# EAGLE board waterworx (EAGLE 6.2)
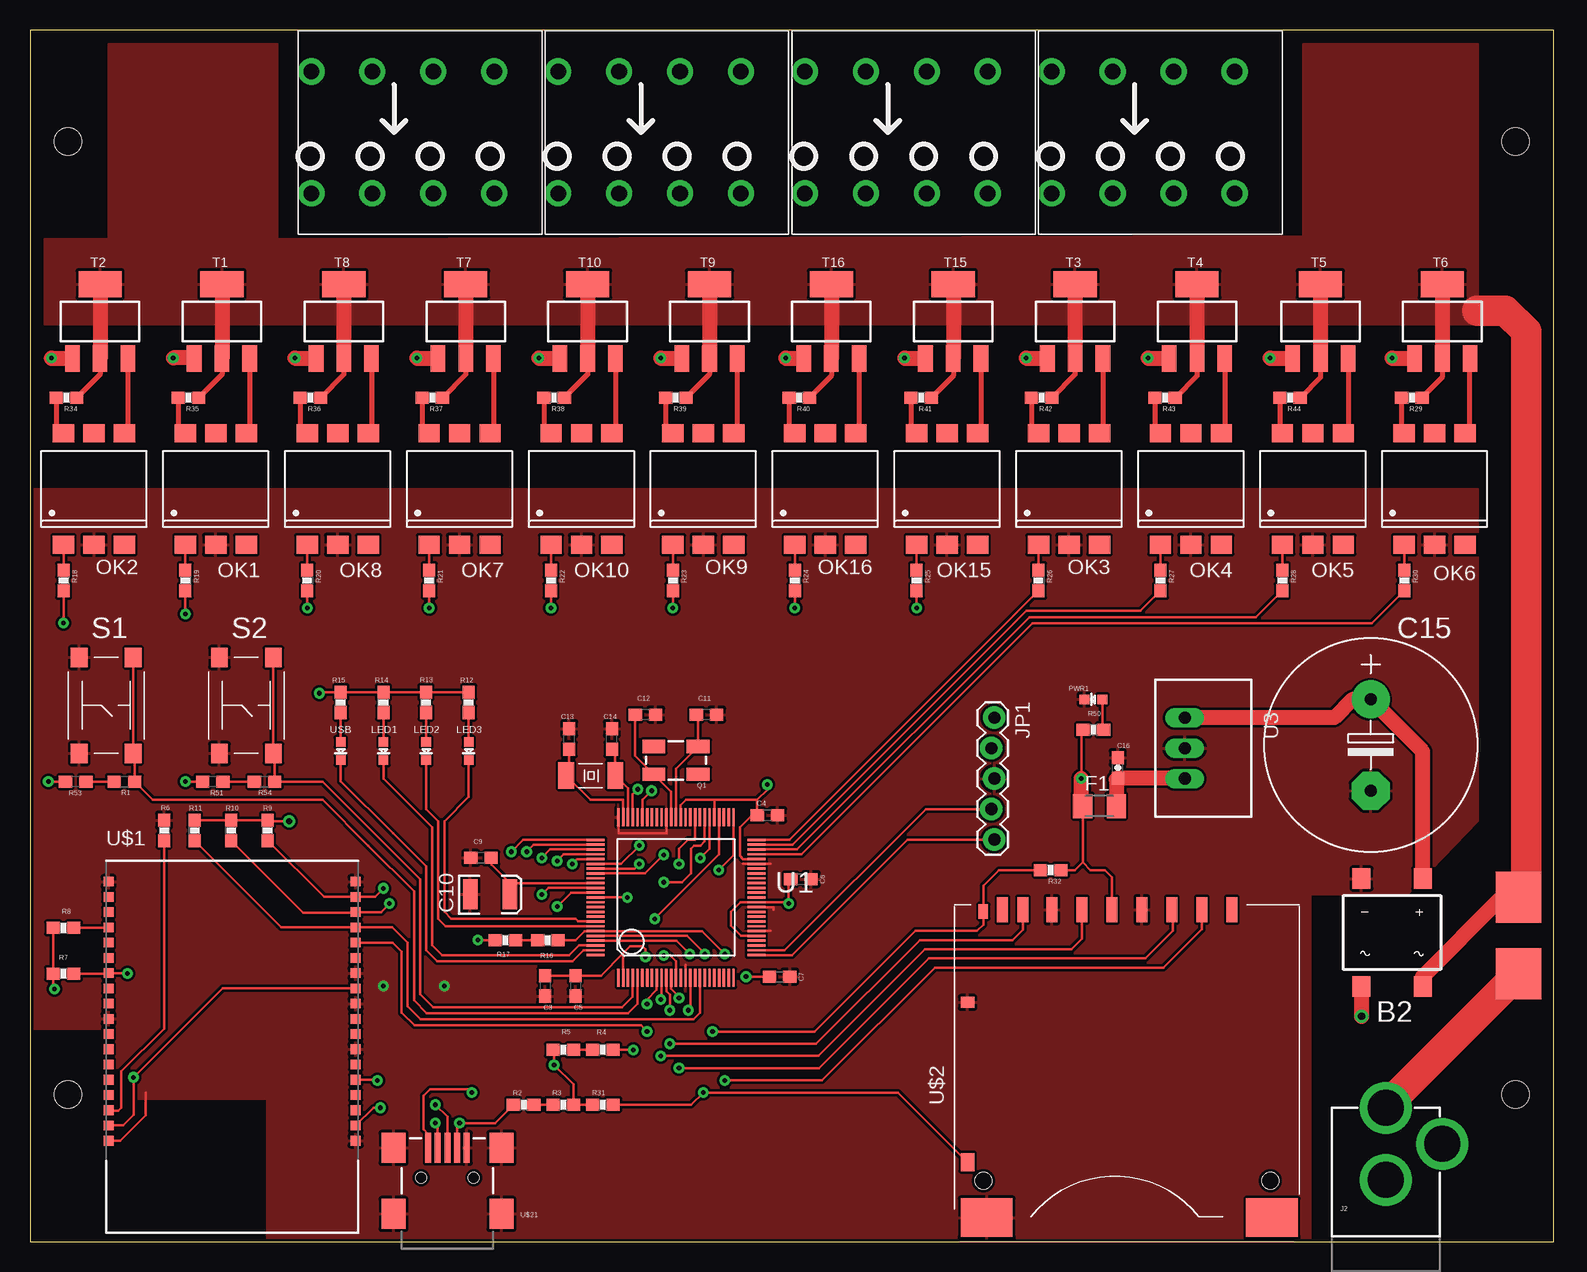
[diagram p0: board, top side]
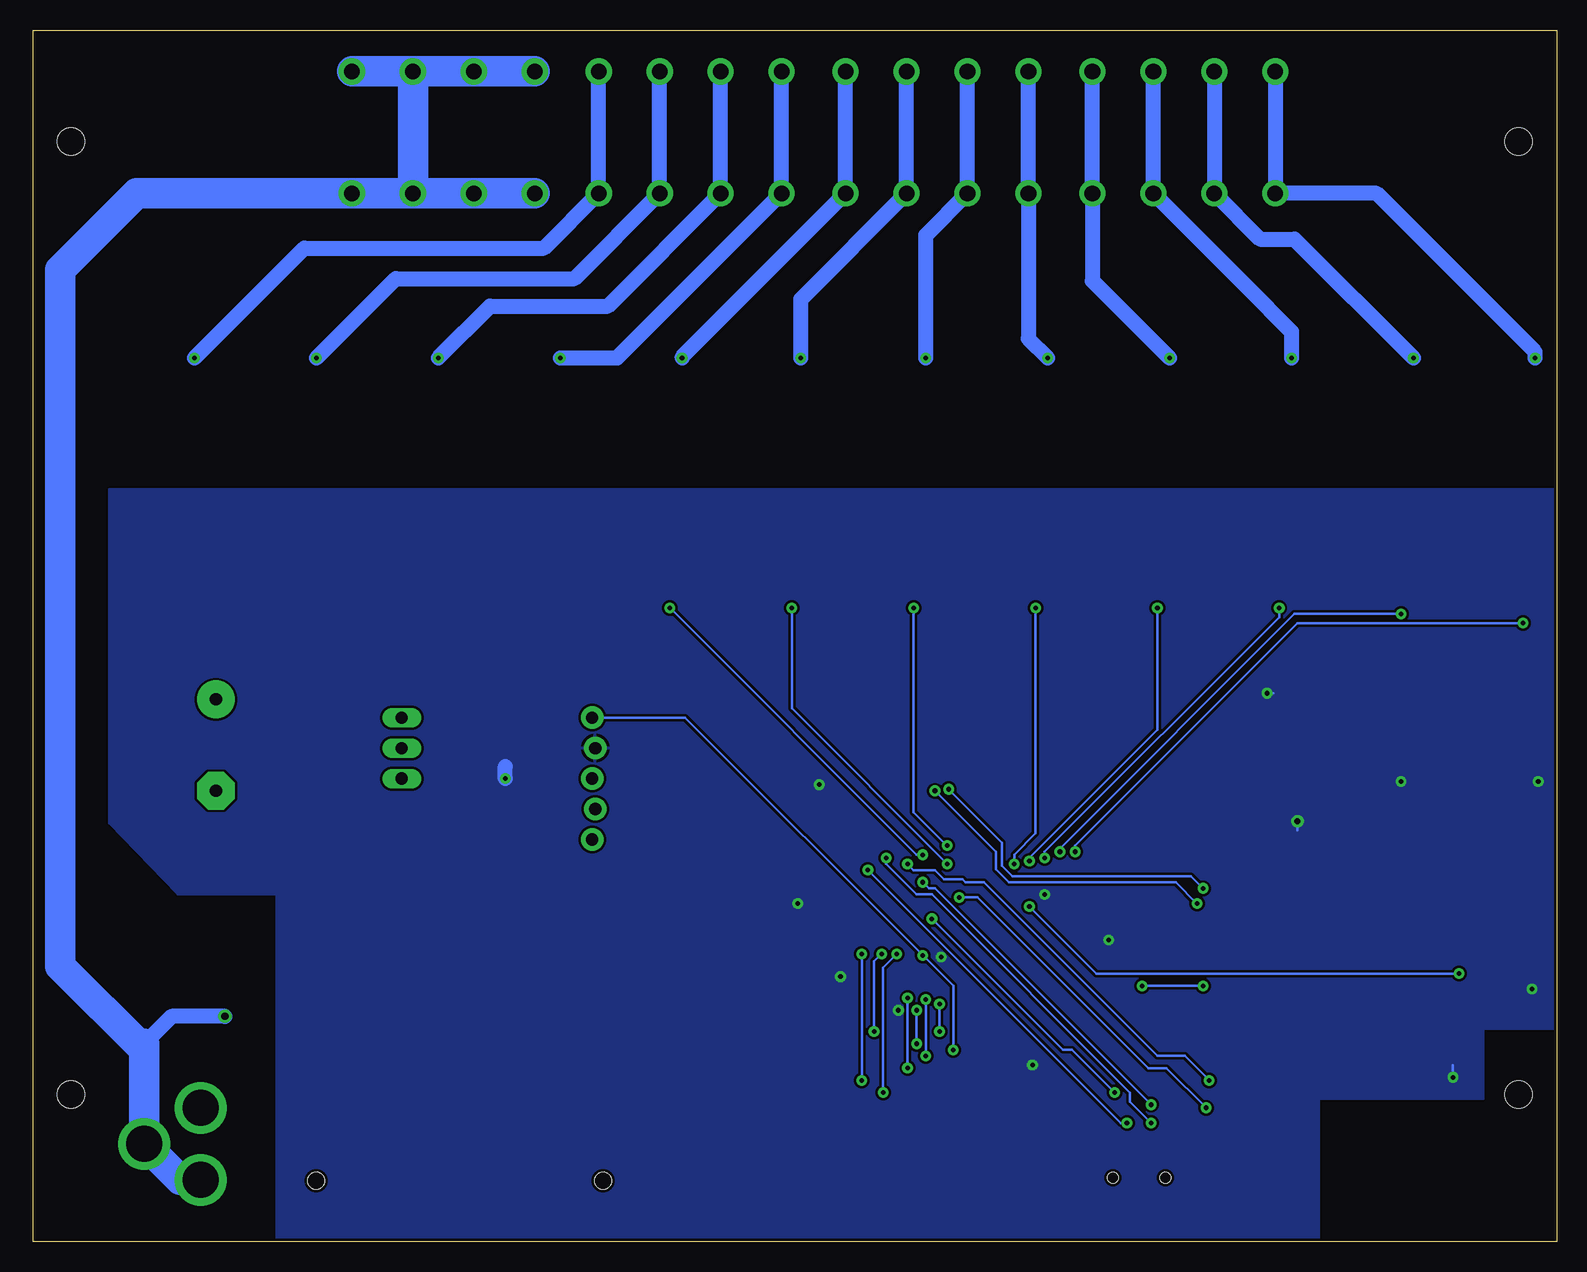
[diagram p1: board, bottom side, seen from below]

Size 127 x 100.99 mm. Coordinates in mm from the lower left corner, seen from the top.
Outline: 0,0 127,0 127,100.99 0,100.99 0,0
Copper layers (1*16): Top 0.035mm / dielectric 1.5mm / Bottom 0.035mm
Design rules: minimum track width 7mil, minimum drill 15mil, track to track 8mil, track to pad 8mil, pad to pad 8mil, via to via 8mil, smd to smd 8mil, copper to edge 10mil, drill to drill 8mil, minimum pad ring 12mil, minimum via ring 10mil, stop-mask expansion 4mil, vias tented up to drill 25mil, thermal gap 10mil
Holes 2.29 mm at 3.17,91.7 3.17,12.3 123.83,12.3 123.83,91.7

## Footprints (pad centres in the part's own frame; a part is rotated, then mirrored left to right if it is on the bottom)
DFS = smd 1.5 x 1.7: + -2.55,-4.5; - 2.55,-4.5; AC1 -2.55,4.5; AC2 2.55,4.5
0603 = smd 1.1 x 1: 1 -0.85,0; 2 0.85,0
EIA3528 = smd 1.2 x 2.5: A 1.65,0; C -1.65,0
E7,5-18 = drill 1.016 pad 3.15: + -3.81,0 | drill 1.016 pad 3.15 octagon: - 3.81,0
0603-CAP = smd 1.1 x 1: 1 -0.85,0; 2 0.85,0
M1206 = smd 1.6 x 2: 1 -1.4,0; 2 1.4,0
NANO2_HOLDER = smd 4.24 x 3.81: 1 -3.185,0; 2 3.185,0
POWER_JACK_PTH = drill 2.997 pad 4.318: GND 0,7.7; GNDBREAK 4.7,10.7; PWR 0,13.7
1X05_LOCK = drill 1.016 pad 1.88: 1 0,0.127; 2 2.54,-0.127; 3 5.08,0.127; 4 7.62,-0.127; 5 10.16,0.127
PHOENIX_TERMINAL_4 = drill 1.3 pad 2.184: 1B 1.1,-5.08; 1T 1.1,5.08; 2B 6.18,-5.08; 2T 6.18,5.08; 3B 11.26,-5.08; 3T 11.26,5.08; 4B 16.34,-5.08; 4T 16.34,5.08
LED-0603 = smd 0.8 x 0.8: A 0,-0.75; C 0,0.75
DIL6-SMD = smd 1.78 x 1.52: 1 -2.54,-4.645; 2 0,-4.645; 3 2.54,-4.645; 4 2.54,4.645; 5 0,4.645; 6 -2.54,4.645
CRYSTAL-SMD-5X3 = smd 1.9 x 1.1: 1 -1.85,-1.15; 2 1.85,-1.15; 3 1.85,1.15; 4 -1.85,1.15
CRYSTAL-SMD-4X2 = smd 1.3 x 2.2: P$1 -2.05,0; P$2 2.05,0
0603-RES = smd 1.1 x 1: 1 -0.85,0; 2 0.85,0
SWITCH-OMRON = smd 1.6 x 1.4: 1 4,-2.25; 2 -4,-2.25; 3 4,2.25; 4 -4,2.25
SOT223 = smd 1.219 x 2.235: 1 -2.311,-3.099; 2 0,-3.099; 3 2.311,-3.099 | smd 3.6 x 2.2: 4 0,3.099
TQFP100 = smd 0.2 x 1.5: 1 -4.8,-6.7; 2 -4.4,-6.7; 3 -4,-6.7; 4 -3.6,-6.7; 5 -3.2,-6.7; 6 -2.8,-6.7; 7 -2.4,-6.7; 8 -2,-6.7; 9 -1.6,-6.7; 10 -1.2,-6.7; 11 -0.8,-6.7; 12 -0.4,-6.7; 13 0,-6.7; 14 0.4,-6.7; 15 0.8,-6.7; 16 1.2,-6.7; 17 1.6,-6.7; 18 2,-6.7; 19 2.4,-6.7; 20 2.8,-6.7; 21 3.2,-6.7; 22 3.6,-6.7; 23 4,-6.7; 24 4.4,-6.7; 25 4.8,-6.7; 51 4.8,6.7; 52 4.4,6.7; 53 4,6.7; 54 3.6,6.7; 55 3.2,6.7; 56 2.8,6.7; 57 2.4,6.7; 58 2,6.7; 59 1.6,6.7; 60 1.2,6.7; 61 0.8,6.7; 62 0.4,6.7; 63 0,6.7; 64 -0.4,6.7; 65 -0.8,6.7; 66 -1.2,6.7; 67 -1.6,6.7; 68 -2,6.7; 69 -2.4,6.7; 70 -2.8,6.7; 71 -3.2,6.7; 72 -3.6,6.7; 73 -4,6.7; 74 -4.4,6.7; 75 -4.8,6.7 | smd 1.5 x 0.2: 26 6.7,-4.8; 27 6.7,-4.4; 28 6.7,-4; 29 6.7,-3.6; 30 6.7,-3.2; 31 6.7,-2.8; 32 6.7,-2.4; 33 6.7,-2; 34 6.7,-1.6; 35 6.7,-1.2; 36 6.7,-0.8; 37 6.7,-0.4; 38 6.7,0; 39 6.7,0.4; 40 6.7,0.8; 41 6.7,1.2; 42 6.7,1.6; 43 6.7,2; 44 6.7,2.4; 45 6.7,2.8; 46 6.7,3.2; 47 6.7,3.6; 48 6.7,4; 49 6.7,4.4; 50 6.7,4.8; 76 -6.7,4.8; 77 -6.7,4.4; 78 -6.7,4; 79 -6.7,3.6; 80 -6.7,3.2; 81 -6.7,2.8; 82 -6.7,2.4; 83 -6.7,2; 84 -6.7,1.6; 85 -6.7,1.2; 86 -6.7,0.8; 87 -6.7,0.4; 88 -6.7,0; 89 -6.7,-0.4; 90 -6.7,-0.8; 91 -6.7,-1.2; 92 -6.7,-1.6; 93 -6.7,-2; 94 -6.7,-2.4; 95 -6.7,-2.8; 96 -6.7,-3.2; 97 -6.7,-3.6; 98 -6.7,-4; 99 -6.7,-4.4; 100 -6.7,-4.8
RECOM = drill 1.016 long: GND 0,-2.54; VIN -2.54,-2.54; VOUT 2.54,-2.54
SMD_MRF = smd 0.85 x 0.8: 1 0.2,-1.73; 2 0.2,-3; 3 0.2,-4.27; 4 0.2,-5.54; 5 0.2,-6.81; 6 0.2,-8.08; 7 0.2,-9.35; 8 0.2,-10.62; 9 0.2,-11.89; 10 0.2,-13.16; 11 0.2,-14.43; 12 0.2,-15.7; 13 0.2,-16.97; 14 0.2,-18.24; 15 0.2,-19.51; 16 0.2,-20.78; 17 0.2,-22.05; 18 0.2,-23.32; 19 20.8,-23.32; 20 20.8,-22.05; 21 20.8,-20.78; 22 20.8,-19.51; 23 20.8,-18.24; 24 20.8,-16.97; 25 20.8,-15.7; 26 20.8,-14.43; 27 20.8,-13.16; 28 20.8,-11.89; 29 20.8,-10.62; 30 20.8,-9.35; 31 20.8,-8.08; 32 20.8,-6.81; 33 20.8,-5.54; 34 20.8,-4.27; 35 20.8,-3; 36 20.8,-1.73
SD_ALPS = smd 0.9 x 2.1: 1 6.255,22.6; 2 3.755,22.6; 3 1.255,22.6; 4 -1.245,22.6; 5 -3.745,22.6; 6 -6.245,22.6; 7 -8.67,22.6; 8 -10.37,22.6; 9 8.755,22.6 | smd 4.32 x 3.2: 12 -11.69,-3.05; 13 12.09,-3.05 | smd 0.8 x 1.2: CD -11.97,22.45 | smd 1.13 x 0.9: VSS -13.285,14.88 | smd 1.13 x 1.5: WP -13.285,1.57 | hole 1.4: 11.97,0; -11.97,0
USB-MINIB = smd 2.5 x 0.5: D+ 2.5,0; D- 2.5,0.8; GND 2.5,-1.6; ID 2.5,-0.8; VBUS 2.5,1.6 | smd 2.5 x 2: MTN1 -3,4.5; MTN2 2.5,4.5; MTN3 -3,-4.5; MTN4 2.5,-4.5 | hole 0.9: 0,2.2; 0,-2.2

## Placement (x,y rotation side)
B2  DF01S  [DFS]  113.54,25.78 180 top
C3  0.1uF  [0603]  42.93,21.34 270 top
C4  0.1uF  [0603]  61.47,35.56 0 top
C5  0.1uF  [0603]  45.47,21.34 270 top
C6  0.1uF  [0603]  64.26,30.23 0 top
C7  0.1uF  [0603]  62.48,22.1 0 top
C9  0.1uF  [0603]  37.59,32 180 top
C10  10uF  [EIA3528]  38.35,28.96 0 top
C11  18pF  [0603]  56.39,43.94 180 top
C12  18pF  [0603]  51.31,43.94 180 top
C13  11pf  [0603]  44.96,41.91 90 top
C14  11pf  [0603]  48.51,41.91 90 top
C15  1000uF  [E7,5-18]  111.76,41.4 270 top
C16  1uF  [0603-CAP]  90.68,39.5 90 top
F1  500mA PTC Fuse  [M1206]  89.15,36.32 0 top
F2  [NANO2_HOLDER]  124.08,25.53 90 top
J2  POWER_JACKPTH  [POWER_JACK_PTH]  113.03,-2.54 0 top
JP1  [1X05_LOCK]  80.26,43.69 270 top
JP2  Stations 1-4  [PHOENIX_TERMINAL_4]  22.35,92.46 0 top
JP3  Stations 5-8  [PHOENIX_TERMINAL_4]  42.93,92.46 0 top
JP4  Stations 9-12  [PHOENIX_TERMINAL_4]  63.5,92.46 0 top
JP6  COM  [PHOENIX_TERMINAL_4]  84.07,92.46 0 top
LED1  WHITE  [LED-0603]  29.46,40.89 180 top
LED2  RED  [LED-0603]  33.02,40.89 180 top
LED3  YELLOW  [LED-0603]  36.58,40.89 180 top
OK1  MOC3032S  [DIL6-SMD]  15.49,62.74 0 top
OK2  MOC3032S  [DIL6-SMD]  5.33,62.74 0 top
OK3  MOC3032S  [DIL6-SMD]  86.61,62.74 0 top
OK4  MOC3032S  [DIL6-SMD]  96.77,62.74 0 top
OK5  MOC3032S  [DIL6-SMD]  106.93,62.74 0 top
OK6  MOC3032S  [DIL6-SMD]  117.09,62.74 0 top
OK7  MOC3032S  [DIL6-SMD]  35.81,62.74 0 top
OK8  MOC3032S  [DIL6-SMD]  25.65,62.74 0 top
OK9  MOC3032S  [DIL6-SMD]  56.13,62.74 0 top
OK10  MOC3032S  [DIL6-SMD]  45.97,62.74 0 top
OK15  MOC3032S  [DIL6-SMD]  76.45,62.74 0 top
OK16  MOC3032S  [DIL6-SMD]  66.29,62.74 0 top
PWR1  BLUE  [LED-0603]  88.65,45.21 90 top
Q1  8MHz  [CRYSTAL-SMD-5X3]  53.85,40.13 180 top
Q2  32.768 KHz  [CRYSTAL-SMD-4X2]  46.74,38.86 0 top
R1  4.7K  [0603]  7.87,38.35 0 top
R2  4.7K  [0603-RES]  41.15,11.43 0 top
R3  4.7K  [0603-RES]  44.45,11.43 0 top
R4  4.7K  [0603-RES]  47.75,16 180 top
R5  4.7K  [0603-RES]  44.45,16 0 top
R6  4.7K  [0603-RES]  11.18,34.29 270 top
R7  4.7K  [0603-RES]  2.79,22.35 180 top
R8  4.7K  [0603-RES]  2.79,26.16 0 top
R9  4.7K  [0603-RES]  19.81,34.29 90 top
R10  4.7K  [0603-RES]  16.76,34.29 90 top
R11  4.7K  [0603-RES]  13.72,34.29 90 top
R12  330  [0603-RES]  36.58,44.96 90 top
R13  330  [0603-RES]  33.02,44.96 90 top
R14  330  [0603-RES]  29.46,44.96 90 top
R15  330  [0603-RES]  25.91,44.96 90 top
R16  4.7K  [0603-RES]  43.18,25.15 0 top
R17  4.7K  [0603-RES]  39.62,25.15 180 top
R18  330  [0603-RES]  2.79,55.12 270 top
R19  330  [0603-RES]  12.95,55.12 270 top
R20  330  [0603-RES]  23.11,55.12 270 top
R21  330  [0603-RES]  33.27,55.12 270 top
R22  330  [0603-RES]  43.43,55.12 270 top
R23  330  [0603-RES]  53.59,55.12 270 top
R24  330  [0603-RES]  63.75,55.12 270 top
R25  330  [0603-RES]  73.91,55.12 270 top
R26  330  [0603-RES]  84.07,55.12 270 top
R27  330  [0603-RES]  94.23,55.12 270 top
R28  330  [0603-RES]  104.39,55.12 270 top
R29  33  [0603-RES]  115.19,70.36 180 top
R30  330  [0603-RES]  114.55,55.12 270 top
R31  4.7K  [0603-RES]  47.75,11.43 0 top
R32  4.7K  [0603-RES]  85.09,30.99 180 top
R34  33  [0603-RES]  3.05,70.36 180 top
R35  33  [0603-RES]  13.21,70.36 180 top
R36  33  [0603-RES]  23.37,70.36 180 top
R37  33  [0603-RES]  33.53,70.36 180 top
R38  33  [0603-RES]  43.69,70.36 180 top
R39  33  [0603-RES]  53.85,70.36 180 top
R40  33  [0603-RES]  64.14,70.36 180 top
R41  33  [0603-RES]  74.3,70.36 180 top
R42  33  [0603-RES]  84.33,70.36 180 top
R43  33  [0603-RES]  94.61,70.36 180 top
R44  33  [0603-RES]  105.03,70.36 180 top
R50  330  [0603-RES]  88.65,42.67 180 top
R51  4.7K  [0603]  15.24,38.35 180 top
R53  4.7K  [0603]  3.81,38.35 180 top
R54  4.7K  [0603]  19.56,38.35 0 top
S1  S1  [SWITCH-OMRON]  6.35,44.7 270 top
S2  [SWITCH-OMRON]  18.03,44.7 270 top
T1  LF-TRIACSOT223  [SOT223]  16,76.71 0 top
T2  LF-TRIACSOT223  [SOT223]  5.84,76.71 0 top
T3  LF-TRIACSOT223  [SOT223]  87.12,76.71 0 top
T4  LF-TRIACSOT223  [SOT223]  97.28,76.71 0 top
T5  LF-TRIACSOT223  [SOT223]  107.57,76.71 0 top
T6  LF-TRIACSOT223  [SOT223]  117.73,76.71 0 top
T7  LF-TRIACSOT223  [SOT223]  36.32,76.71 0 top
T8  LF-TRIACSOT223  [SOT223]  26.16,76.71 0 top
T9  LF-TRIACSOT223  [SOT223]  56.64,76.71 0 top
T10  LF-TRIACSOT223  [SOT223]  46.48,76.71 0 top
T15  LF-TRIACSOT223  [SOT223]  76.96,76.71 0 top
T16  LF-TRIACSOT223  [SOT223]  66.8,76.71 0 top
U1  PIC32MX460F512L TQFP100  [TQFP100]  53.85,28.7 0 top
U3  RECOM_X.X_REG78XX  [RECOM]  98.81,41.15 270 top
U$1  MRF24WB0MA  [SMD_MRF]  6.35,31.75 0 top
U$2  SD_CARD_SOCKETALPS  [SD_ALPS]  91.44,5.08 0 top
U$21  USB-MINIB-5PIN  [USB-MINIB]  34.8,5.33 90 top
USB  GREEN  [LED-0603]  25.91,40.89 180 top

## Library data of the parts
B2 F2 J2 JP2-JP4 JP6 Q2 S1 S2 T1-T10 T15 T16 U3 U$1 U$2 = lizardworx
C3-C6 C9 C11-C14 LED1-LED3 PWR1 R1 R51 R53 R54 USB = SparkFun
C7 C10 = SparkFun02-20-08
C15 = rcl
C16 R2-R32 R34-R44 R50 = SparkFun-Passives
F1 = resistor
JP1 U$21 = SparkFun-Connectors
OK1-OK10 OK15 OK16 = lizardworx; MF: FAIRCHILD SEMICONDUCTOR; MPN: MOC3032S-M; OC_FARNELL: unknown; OC_NEWARK: 05C2871
Q1 = SparkFun11_03_09
U1 = SchmalzHaus

## Nets
3.3V: C3.1 C4.1 C5.1 C6.1 C7.1 F1.1 JP1.2 R3.2 R5.1 R7.2 R8.1 R9.2 R10.2 R11.2 R12.2 R13.2 R14.2 R15.2 R17.2 R31.1 R32.1 R50.2 R51.2 R53.2 U1.2 U1.16 U1.30 U1.37 U1.46 U1.55 U1.62 U1.86 U$1.17 U$1.29 U$2.4
AC_HOT: B2.AC1 F2.2 R29.1 R34.1 R35.1 R36.1 R37.1 R38.1 R39.1 R40.1 R41.1 R42.1 R43.1 R44.1 T1.2 T1.4 T2.2 T2.4 T3.2 T3.4 T4.2 T4.4 T5.2 T5.4 T6.2 T6.4 T7.2 T7.4 T8.2 T8.4 T9.2 T9.4 T10.2 T10.4 T15.2 T15.4 T16.2 T16.4
AC_NEUTRAL: B2.AC2 J2.GND J2.GNDBREAK JP6.1B JP6.1T JP6.2B JP6.2T JP6.3B JP6.3T JP6.4B JP6.4T
CNTRL_1: R18.2 U1.76
CNTRL_2: R19.2 U1.77
CNTRL_3: R20.2 U1.78
CNTRL_4: R21.2 U1.79
CNTRL_5: R22.2 U1.80
CNTRL_6: R23.2 U1.81
CNTRL_7: R24.2 U1.82
CNTRL_8: R25.2 U1.83
CNTRL_9: R26.2 U1.50
CNTRL_10: R27.2 U1.49
CNTRL_11: R28.2 U1.48
CNTRL_12: R30.2 U1.47
D+: U1.57 U$21.D+
D-: U1.56 U$21.D-
GND: B2.- C3.2 C4.2 C5.2 C6.2 C7.2 C9.2 C10.C C11.1 C12.1 C13.2 C14.2 C15.- C16.2 JP1.3 OK1.2 OK2.2 OK3.2 OK4.2 OK5.2 OK6.2 OK7.2 OK8.2 OK9.2 OK10.2 OK15.2 OK16.2 PWR1.C R6.1 S1.1 S1.2 S2.1 S2.2 U1.15 U1.31 U1.36 U1.45 U1.65 U1.75 U3.GND U$1.1 U$1.10 U$1.18 U$1.19 U$1.25 U$1.28 U$1.30 U$1.36 U$2.3 U$2.6 U$2.12 U$2.VSS U$21.GND U$21.MTN1 U$21.MTN2 U$21.MTN3 U$21.MTN4
N$1: OK9.1 R23.1
N$2: OK1.1 R19.1
N$3: R51.1 R54.1
N$4: R1.1 R53.1
N$5: R8.2 U$1.4
N$6: OK1.6 R35.2
N$7: OK9.6 R39.2
N$8: OK1.4 T1.3
N$9: OK2.1 R18.1
N$10: R16.1 R17.1
N$11: R4.2 R5.2
N$12: OK2.6 R34.2
N$13: OK9.4 T9.3
N$14: OK2.4 T2.3
N$15: R2.2 R3.1
N$16: B2.+ C15.+ U3.VIN
N$17: OK3.1 R26.1
N$18: OK3.6 R42.2
N$19: PWR1.A R50.1
N$20: R15.1 USB.A
N$21: OK3.4 T3.3
N$22: LED1.A R14.1
N$23: LED2.A R13.1
N$24: C16.1 F1.2 U3.VOUT
N$25: OK6.1 R30.1
N$26: OK4.1 R27.1
N$27: OK4.6 R43.2
N$28: OK10.1 R22.1
N$29: OK4.4 T4.3
N$30: OK6.6 R29.2
N$31: OK6.4 T6.3
N$32: OK5.1 R28.1
N$33: OK5.6 R44.2
N$34: OK10.6 R38.2
N$35: LED3.A R12.1
N$36: OK5.4 T5.3
N$37: F2.1 J2.PWR
N$41: OK10.4 T10.3
N$45: OK7.1 R21.1
N$46: OK7.6 R37.2
N$48: OK7.4 T7.3
N$51: OK8.1 R20.1
N$52: OK8.6 R36.2
N$54: OK8.4 T8.3
N$76: OK15.1 R25.1
N$77: OK15.6 R41.2
N$78: OK15.4 T15.3
N$81: OK16.1 R24.1
N$82: OK16.6 R40.2
N$83: OK16.4 T16.3
N$110: C9.1 C10.A U1.85
OSC1: C11.2 Q1.1 U1.63
OSC2: C12.2 Q1.3 U1.64
PGC: JP1.5 U1.26
PGD: JP1.4 U1.27
RC13: C14.1 Q2.P$2 U1.73
RC14: C13.1 Q2.P$1 U1.74
RE0: LED3.C U1.93
RE1: LED2.C U1.94
RE2: LED1.C U1.98
RE3: U1.99 USB.C
RE6: R54.2 S2.3 S2.4 U1.4
RE7: R1.2 S1.3 S1.4 U1.5
SD_CD: R32.2 U1.96 U$2.CD
SD_CK: U1.10 U$2.5
SD_CS: R16.2 U1.95 U$2.1
SD_DI: U1.12 U$2.2
SD_DO: U1.11 U$2.7
SD_WP: R31.2 U1.97 U$2.WP
STATION_1: JP2.1B JP2.1T T2.1
STATION_2: JP2.2B JP2.2T T1.1
STATION_3: JP2.3B JP2.3T T8.1
STATION_4: JP2.4B JP2.4T T7.1
STATION_5: JP3.1B JP3.1T T10.1
STATION_6: JP3.2B JP3.2T T9.1
STATION_7: JP3.3B JP3.3T T16.1
STATION_8: JP3.4B JP3.4T T15.1
STATION_9: JP4.1B JP4.1T T3.1
STATION_10: JP4.2B JP4.2T T4.1
STATION_11: JP4.3B JP4.3T T5.1
STATION_12: JP4.4B JP4.4T T6.1
USBID: R2.1 U1.51 U$21.ID
VBUS: U1.54 U$21.VBUS
VPP: JP1.1 R4.1 U1.13
WF_CK: R10.1 U1.70 U$1.34
WF_CS: U1.59 U$1.23
WF_DI: R9.1 U1.72 U$1.35
WF_DO: U1.9 U$1.32
WF_HIBERNATE: U1.88 U$1.20
WF_INT: R11.1 U1.18 U$1.33
WF_RESET: R7.1 U1.87 U$1.7
WF_WP: R6.2 U$1.16

## Tracks (layer width: path | path; a pad name or v marks a point on that pad's centre or on a via)
3.3V  (via drill 0.38, 0.5)
  Top 0.203: R11.2 R10.2 R9.2 19.9,35.05 v21.59,35.05 | U$1.17 7.76,9.7 8.64,10.58 v8.64,13.72 16.05,21.13 U$1.29 | R8.1 R7.2 1.94,21.17 v2.03,21.08 | R50.2 87.63,42.51 v87.63,38.61 | F1.1 87.75,31.62 | 60.62,36.83 57.05,36.83 | 57.05,36.83 U1.55 | U1.62 54.25,36.39 54.69,36.83 57.05,36.83 | 49.45,24.05 U1.2 | 49.45,24.05 50.04,24.64 51.05,24.64 51.31,24.38 v51.31,23.75 | R51.2 v12.95,38.35 | R53.2 v1.52,38.35 | R12.2 R13.2 R14.2 R15.2 24.22,45.81 v24.13,45.72 | R17.2 v37.34,25.15 | R5.1 43.69,16 v43.69,14.73 45.3,13.12 R3.2 R31.1 | C3.1 C5.1 47.59,22.19 49.45,24.05 | U1.30 59.25,25.5 58.42,26.34 58.42,27.5 59.22,28.3 U1.37 63.25,28.3 v63.25,28.19 63.25,30.23 C6.1 | 60.62,36.83 61.47,37.68 v61.47,38.1 | 60.62,36.83 C4.1 60.2,35.56 59.18,34.54 59.18,32.18 59.46,31.9 U1.46 | U1.86 43.22,29.5 v42.67,28.96 | U1.16 55.05,19.49 v54.86,19.3 | R32.1 87.12,30.99 87.75,31.62 | U$2.4 90.19,30.4 89.61,30.99 88.39,30.99 87.75,31.62 | v59.69,22.1 C7.1
  Top 1.27: F1.1 87.63,36.45 v87.63,38.61
  Bottom 0.203: v21.59,35.05 21.59,34.29 | v8.64,13.72 8.64,14.73 | v12.95,38.35 12.7,38.35 | v1.52,38.35 1.27,38.35 | v24.13,45.72 23.62,45.72 | v61.47,38.1 61.47,38.35 | v51.31,23.75 51.31,23.62 | v42.67,28.96 42.42,28.7 | v54.86,19.3 54.61,19.3
  Bottom 1.27: v87.63,38.61 87.63,39.62
  pour Bottom: 0,17.78 0,62.74 120.65,62.74 120.65,34.9 114.96,28.96 106.68,28.96 106.68,0.25 19.81,0.25 19.81,11.94 6.1,11.94 6.1,17.78
AC_HOT
  Top 0.406: T6.2 117.73,72.05 R29.1 | T5.2 107.57,72.05 R44.1 | T4.2 97.28,72.17 R43.1 | T2.2 5.84,72.3 R34.1 | T1.2 16,72.3 R35.1 | T8.2 26.16,72.3 R36.1 | T7.2 36.32,72.3 R37.1 | T10.2 46.48,72.3 R38.1 | T9.2 56.64,72.3 R39.1 | T16.2 66.8,72.17 R40.1 | T15.2 76.96,72.17 R41.1 | T3.2 87.12,72.3 R42.1
  Top 1.27: T6.4 T6.2 | T5.4 T5.2 | T4.4 T4.2 | T3.4 T3.2 | T15.4 T15.2 | T16.4 T16.2 | T9.4 T9.2 | T10.4 T10.2 | T7.4 T7.2 | T8.4 T8.2 | T1.4 T1.2 | T2.4 T2.2 | B2.AC1 116.09,22.11 122.56,28.57 123.94,28.57 F2.2
  Top 2.54: 120.65,77.6 122.99,77.6 124.71,75.87 124.71,29.35 F2.2
  pour Top: 1.27,76.45 1.27,83.57 6.6,83.57 6.6,99.82 20.57,99.82 20.57,83.57 106.17,83.82 106.17,99.82 120.65,99.82 120.65,76.45
AC_NEUTRAL  (via drill 0.6)
  Top 1.27: B2.AC2 110.99,18.81 v111,18.8
  Bottom 1.27: v111,18.8 115.44,18.8 117.73,16.51
  Bottom 2.54: J2.GND 114.73,5.16 J2.GNDBREAK 117.73,16 | JP6.3B JP6.4B 118.36,87.38 124.71,81.03 124.71,22.99 117.73,16 | JP6.3B JP6.2B JP6.1B | JP6.3B JP6.3T | JP6.1T JP6.2T JP6.3T | JP6.3T JP6.4T | 117.73,16.51 117.73,16
CNTRL_1  (via drill 0.38)
  Top 0.203: U1.76 41.12,33.5 v40.13,32.51 | v2.79,51.56 R18.2
  Bottom 0.203: v2.79,51.56 21.59,51.56 40.13,33.02 v40.13,32.51
CNTRL_2  (via drill 0.38)
  Top 0.203: U1.77 41.99,33.1 v41.4,32.51 | v12.95,52.32 R19.2
  Bottom 0.203: v12.95,52.32 21.84,52.32 41.4,32.77 v41.4,32.51
CNTRL_3  (via drill 0.38)
  Top 0.203: U1.78 43.37,32.7 v42.67,32 | v23.11,52.83 R20.2
  Bottom 0.203: v23.11,52.83 23.11,52.07 42.67,32.51 v42.67,32
CNTRL_4  (via drill 0.38)
  Top 0.203: U1.79 44.49,32.3 v43.94,31.75 | v33.27,52.83 R21.2
  Bottom 0.203: v33.27,52.83 33.27,42.67 43.94,32 v43.94,31.75
CNTRL_5  (via drill 0.38)
  Top 0.203: U1.80 45.62,31.9 v45.21,31.5 | v43.43,52.83 R22.2
  Bottom 0.203: v43.43,52.83 43.43,34.04 45.21,32.26 v45.21,31.5
CNTRL_6  (via drill 0.38)
  Top 0.203: U1.81 49.28,31.5 v50.8,33.02 | v53.59,52.83 R23.2
  Bottom 0.203: v50.8,33.02 53.59,35.81 v53.59,52.83
CNTRL_7  (via drill 0.38)
  Top 0.203: U1.82 50.41,31.1 v50.8,31.5 | v63.75,52.83 R24.2
  Bottom 0.203: v63.75,52.83 63.75,44.45 v50.8,31.5
CNTRL_8  (via drill 0.38)
  Top 0.203: U1.83 51.28,30.7 v52.83,32.26 | v73.91,52.83 R25.2
  Bottom 0.203: v52.83,32.26 53.34,32.26 v73.91,52.83
CNTRL_9
  Top 0.203: U1.50 63.31,33.5 R26.2
CNTRL_10
  Top 0.203: U1.49 63.58,33.1 83.06,52.58 92.54,52.58 R27.2
CNTRL_11
  Top 0.203: U1.48 63.94,32.7 83.31,52.07 102.2,52.07 R28.2
CNTRL_12
  Top 0.203: U1.47 64.31,32.3 83.57,51.56 111.85,51.56 R30.2
D+  (via drill 0.38)
  Top 0.203: U1.57 56.25,33.39 55.88,33.02 55.37,33.02 55.12,32.77 55.12,30.73 54.36,29.97 v52.83,29.97 | U$21.D+ 34.8,10.41 v33.78,11.43
  Bottom 0.203: 34.04,11.43 v33.78,11.43 51.82,29.46 52.32,29.46 v52.83,29.97
D-  (via drill 0.38)
  Top 0.203: U1.56 56.65,32.77 v55.88,32 | U$21.D- 34,9.69 v33.78,9.91
  Bottom 0.203: v33.78,9.91 35.56,11.68 35.56,12.45 52.07,28.96 53.34,28.96 55.88,31.5 v55.88,32
GND  (via drill 0.38)
  Top 0.203: U1.65 53.05,34.04 49.05,34.04 U1.75 | U1.31 61.72,25.91 | U1.45 59.44,31.5 | 59.44,31.5 arc90 59.44,31.5 | 59.44,31.5 59.45,31.5 61.72,31.5 | U1.36 61.98,27.9 61.98,27.69 | U1.15 54.65,23.11 | U$1.18 7.53,8.43 9.65,10.55 9.65,12.45
  Bottom 0.203: v34.54,21.34 v29.46,21.34
  pour Top (rank 4): 19.81,11.94 6.1,11.94 6.1,17.78 0,17.78 0,62.74 120.65,62.74 120.65,35.06 114.8,28.96 106.68,28.96 106.68,0 19.81,0
N$1
  Top 0.203: R23.1 OK9.1
N$2
  Top 0.203: R19.1 OK1.1
N$3
  Top 0.203: 18.54,38.35 R54.1 R51.1 16,38.35
N$4
  Top 0.203: R1.1 R53.1
N$5
  Top 0.203: R8.2 6.5,26.16 U$1.4
N$6
  Top 0.406: R35.2 12.36,67.98 OK1.6
N$7
  Top 0.406: R39.2 53,67.98 OK9.6
N$8
  Top 0.406: 17.8,67.61 OK1.4 18.31,67.66 T1.3
N$9
  Top 0.203: R18.1 OK2.1
N$10
  Top 0.203: R17.1 R16.1
N$11
  Top 0.203: R4.2 R5.2
N$12
  Top 0.406: R34.2 2.2,67.98 OK2.6
N$13
  Top 0.406: 58.45,67.61 OK9.4 58.95,67.66 T9.3
N$14
  Top 0.406: 7.64,67.61 OK2.4 8.15,67.66 T2.3
N$15
  Top 0.203: R2.2 R3.1
N$16
  Top 1.27: U3.VIN 108.71,43.69 110.24,45.21 C15.+ 116.09,40.88 B2.+
N$17
  Top 0.203: R26.1 OK3.1
N$18
  Top 0.406: R42.2 83.48,67.98 OK3.6
N$19
  Top 0.203: R50.1 89.4,42.77 PWR1.A
N$20
  Top 0.203: USB.A R15.1
N$21
  Top 0.406: 88.92,67.61 OK3.4 89.43,67.66 T3.3
N$22
  Top 0.203: LED1.A R14.1
N$23
  Top 0.203: LED2.A R13.1
N$24
  Top 1.27: U3.VOUT 96.23,38.65 C16.1 90.55,38.52 F1.2
N$25
  Top 0.203: R30.1 OK6.1
N$26
  Top 0.203: R27.1 OK4.1
N$27
  Top 0.406: R43.2 93.77,67.85 OK4.6
N$28
  Top 0.203: R22.1 OK10.1
N$29
  Top 0.406: 99.08,67.61 OK4.4 99.59,67.66 T4.3
N$30
  Top 0.406: OK6.6 114.34,67.6 R29.2
N$31
  Top 0.406: OK6.4 120.04,67.79 T6.3
N$32
  Top 0.203: R28.1 OK5.1
N$33
  Top 0.406: R44.2 104.18,67.6 OK5.6
N$34
  Top 0.406: R38.2 42.84,67.98 OK10.6
N$35
  Top 0.203: LED3.A R12.1
N$36
  Top 0.406: T5.3 109.88,67.38 OK5.4
N$37
  Top 2.54: J2.PWR 113.03,11.29 F2.1
N$41
  Top 0.406: 48.28,67.61 OK10.4 48.79,67.66 T10.3
N$45
  Top 0.203: R21.1 OK7.1
N$46
  Top 0.406: R37.2 32.68,67.98 OK7.6
N$48
  Top 0.406: 38.12,67.61 OK7.4 38.63,67.66 T7.3
N$51
  Top 0.203: R20.1 OK8.1
N$52
  Top 0.406: R36.2 22.52,67.98 OK8.6
N$54
  Top 0.406: 27.96,67.61 OK8.4 28.47,67.66 T8.3
N$76
  Top 0.203: R25.1 OK15.1
N$77
  Top 0.406: R41.2 73.44,67.85 OK15.6
N$78
  Top 0.406: 78.77,67.61 OK15.4 79.27,67.66 T15.3
N$81
  Top 0.203: R24.1 OK16.1
N$82
  Top 0.406: R40.2 63.28,67.85 OK16.6
N$83
  Top 0.406: 68.61,67.61 OK16.4 69.11,67.66 T16.3
N$110
  Top 0.203: U1.85 40,29.9 | 40,29.9 C10.A | C9.1 38.48,32 38.48,31.43 40,29.9
OSC1
  Top 0.203: U1.63 53.85,39.43 Q1.1 55.7,43.78 C11.2
OSC2
  Top 0.203: U1.64 53.45,37.53 Q1.3 50.46,40.52 C12.2
PGC
  Top 0.203: U1.26 60.57,23.88 63.5,23.88 73.15,33.53 JP1.5
PGD
  Top 0.203: U1.27 62.91,24.3 74.68,36.07 JP1.4
RC13
  Top 0.203: U1.73 49.85,37.8 Q2.P$2 48.79,41.06 C14.1
RC14
  Top 0.203: U1.74 49.45,36.83 46.72,36.83 Q2.P$1 44.96,38.86 C13.1
RE0
  Top 0.203: U1.93 45.69,26.7 45.47,26.92 35.11,26.92 34.54,27.49 34.54,35.05 36.58,37.08 LED3.C
RE1
  Top 0.203: U1.94 34.66,26.3 34.04,26.93 34.04,35.05 33.02,36.07 LED2.C
RE2
  Top 0.203: U1.98 45.78,24.7 44.96,23.88 34.35,23.88 33.53,24.7 33.53,34.54 29.46,38.61 LED1.C
RE3
  Top 0.203: USB.C 25.91,38.41 30.28,34.04 33.02,31.29 33.02,24.3 33.95,23.37 45.21,23.37 46.15,24.3 U1.99
RE6
  Top 0.203: U1.4 50.25,20.44 49.37,19.56 33.59,19.56 32.51,20.64 32.51,30.23 24.38,38.35 R54.2 20.41,40.58 S2.3 S2.4
RE7
  Top 0.203: U1.5 50.65,19.84 49.85,19.05 33.08,19.05 32,20.13 32,29.21 28.19,33.02 24.38,36.83 10.25,36.83 R1.2 8.72,40.58 S1.3 | S1.3 S1.4 | S1.3 8.47,40.57
SD_CD  (via drill 0.38)
  Top 0.203: v56.9,17.53 65.41,17.53 73.8,25.91 78.93,25.91 79.47,26.45 U$2.CD 79.47,29.69 80.77,30.99 R32.2 | U1.96 54.76,25.5 v56.26,24
  Bottom 0.203: v56.26,24 56.9,23.37 v56.9,17.53
SD_CK  (via drill 0.38)
  Top 0.203: U1.10 52.65,20.26 v52.58,20.19 | U$2.5 87.69,25.28 86.8,24.38 74.61,24.38 65.72,15.49 v52.58,15.49
  Bottom 0.203: v52.58,20.19 v52.58,15.49
SD_CS  (via drill 0.38)
  Top 0.203: v57.91,13.46 66.04,13.46 75.44,22.86 94.49,22.86 97.69,26.07 U$2.1 | R16.2 45.47,25.15 46.22,25.9 U1.95 56.01,25.9 v57.91,24
  Bottom 0.203: v57.91,24 v57.91,13.46
SD_DI  (via drill 0.38)
  Top 0.203: v54.1,14.48 65.79,14.48 74.93,23.62 92.96,23.62 95.25,25.91 95.25,27.62 | U1.12 53.45,21.1 54.1,20.45 v54.1,20.32
  Top 0.254: 95.25,27.62 U$2.2
  Bottom 0.203: v54.1,20.32 v54.1,14.48
SD_DO  (via drill 0.38)
  Top 0.203: U$2.7 82.77,26.02 81.89,25.15 74.17,25.15 65.53,16.51 v53.34,16.51 | U1.11 53.05,20.87 53.34,20.57 v53.34,19.3
  Bottom 0.203: v53.34,19.3 v53.34,16.51
SD_WP  (via drill 0.38)
  Top 0.203: U$2.WP 72.36,12.45 v56.13,12.45 55.12,11.43 R31.2 | U1.97 53.89,25.1 v54.99,24
  Bottom 0.203: v54.99,24 56.13,22.86 v56.13,12.45
STATION_1  (via drill 0.38)
  Top 1.27: T2.1 1.78,73.61 v1.78,73.66
  Bottom 1.27: v1.78,73.66 1.78,74.17 14.99,87.38 JP2.1B JP2.1T
STATION_2  (via drill 0.38)
  Top 1.27: T1.1 13.64,73.66 v11.94,73.66
  Bottom 1.27: JP2.2T JP2.2B 24.72,83.57 21.84,83.57 v11.94,73.66
STATION_3  (via drill 0.38)
  Top 1.27: T8.1 22.15,73.61 v22.1,73.66
  Bottom 1.27: JP2.3T JP2.3B 25.91,79.67 22.1,75.86 v22.1,73.66
STATION_4  (via drill 0.38)
  Top 1.27: T7.1 32.31,73.61 v32.26,73.66
  Bottom 1.27: JP2.4T JP2.4B 38.69,80.09 v32.26,73.66
STATION_5  (via drill 0.38)
  Top 1.27: T10.1 42.47,73.61 v42.42,73.66
  Bottom 1.27: JP3.1T JP3.1B 44.03,75.27 v42.42,73.66
STATION_6  (via drill 0.38)
  Top 1.27: T9.1 52.63,73.61 v52.58,73.66
  Bottom 1.27: JP3.2T JP3.2B 52.58,83.9 v52.58,73.66
STATION_7  (via drill 0.38)
  Top 1.27: T16.1 63.04,73.61 v62.99,73.66
  Bottom 1.27: JP3.3T JP3.3B 62.99,78.57 v62.99,73.66
STATION_8  (via drill 0.38)
  Top 1.27: T15.1 72.95,73.61 v72.9,73.66
  Bottom 1.27: JP3.4T JP3.4B 72.9,73.74 v72.9,73.66
STATION_9  (via drill 0.38)
  Top 1.27: T3.1 83.11,73.61 v83.06,73.66
  Bottom 1.27: JP4.1T JP4.1B 78.32,73.66 v83.06,73.66
STATION_10  (via drill 0.38)
  Top 1.27: T4.1 93.27,73.61 v93.22,73.66
  Bottom 1.27: v93.22,73.66 88.9,77.98 79.08,77.98 JP4.2B JP4.2T
STATION_11  (via drill 0.38)
  Top 1.27: T5.1 103.43,73.61 v103.38,73.66
  Bottom 1.27: v103.38,73.66 96.77,80.26 81.87,80.26 JP4.3B JP4.3T
STATION_12  (via drill 0.38)
  Top 1.27: T6.1 113.59,73.61 v113.54,73.66
  Bottom 1.27: v113.54,73.66 104.39,82.8 84.41,82.8 JP4.4B JP4.4T
USBID  (via drill 0.38)
  Top 0.203: U$21.ID 35.6,9.69 v35.81,9.91 38.77,9.91 R2.1 | U1.51 58.65,32.23 v57.4,30.99
  Bottom 0.203: v57.4,30.99 36.32,9.91 v35.81,9.91
VBUS  (via drill 0.38)
  Top 0.203: U$21.VBUS 33.2,8.97 32.79,9.37 32.79,12.18 33.36,12.74 36.54,12.74 v36.83,12.45 | U1.54 57.45,32.3 v52.07,26.92
  Bottom 0.203: v36.83,12.45 40.39,16 41.15,16 v52.07,26.92
VPP  (via drill 0.38)
  Top 0.203: U1.13 53.85,23.37 53.34,23.88 v52.83,23.88 | v50.29,16 R4.1
  Bottom 0.203: v50.29,16 50.29,21.34 v52.83,23.88 72.64,43.69 JP1.1
WF_CK  (via drill 0.38)
  Top 0.203: R10.1 22.77,27.43 26.92,27.43 26.97,27.48 U$1.34 29.26,27.48 v29.97,28.19 | U1.70 51.05,36.82 v51.82,37.59
  Bottom 0.203: v29.97,28.19 31.75,29.97 45.66,29.97 46.74,31.05 46.74,32.51 v51.82,37.59
WF_CS  (via drill 0.38)
  Top 0.203: U1.59 55.45,33.53 54.86,33.53 54.1,32.77 v54.1,31.5 | v28.96,13.46 28.91,13.51 U$1.23
  Bottom 0.203: v54.1,31.5 53.59,30.99 51.82,30.99 51.05,30.23 49.53,30.23 49.28,29.97 47.75,29.97 33.27,15.49 30.99,15.49 v28.96,13.46
WF_DI  (via drill 0.38)
  Top 0.203: R9.1 24.5,28.75 U$1.35 28.75,28.75 v29.46,29.46 | U1.72 50.25,37.29 v50.67,37.72
  Bottom 0.203: v29.46,29.46 30.48,30.48 45.36,30.48 46.23,31.35 46.23,33.27 v50.67,37.72
WF_DO  (via drill 0.38)
  Top 0.203: U$1.32 30.23,24.94 30.99,24.19 30.99,19.11 32.07,18.03 50.93,18.03 v51.44,17.53 | U1.9 52.25,21.01 51.44,20.2 v51.44,19.81
  Bottom 0.203: v51.44,19.81 v51.44,17.53
WF_HIBERNATE  (via drill 0.38)
  Top 0.203: U$1.20 28.63,11.18 v29.21,11.18 | v49.78,28.7 U1.88
  Bottom 0.203: v29.21,11.18 32.51,14.48 34.04,14.48 48.26,28.7 v49.78,28.7
WF_INT
  Top 0.203: R11.1 20.95,26.21 U$1.33 30.2,26.21 31.5,24.91 31.5,19.62 32.57,18.54 55.31,18.54 55.85,19.08 U1.18
WF_RESET  (via drill 0.38)
  Top 0.203: R7.1 6.5,22.35 U$1.7 8.08,22.4 v8.13,22.35 | U1.87 45.1,29.1 v43.94,27.94
  Bottom 0.203: v43.94,27.94 38.35,22.35 v8.13,22.35
WF_WP
  Top 0.203: R6.2 11.18,17.78 7.62,14.22 7.62,11.18 7.37,10.92 6.6,10.92 U$1.16

## Text on the board
tNames: S1 | S2